# EAGLE board 226_grideye_l (EAGLE 9.6.2)
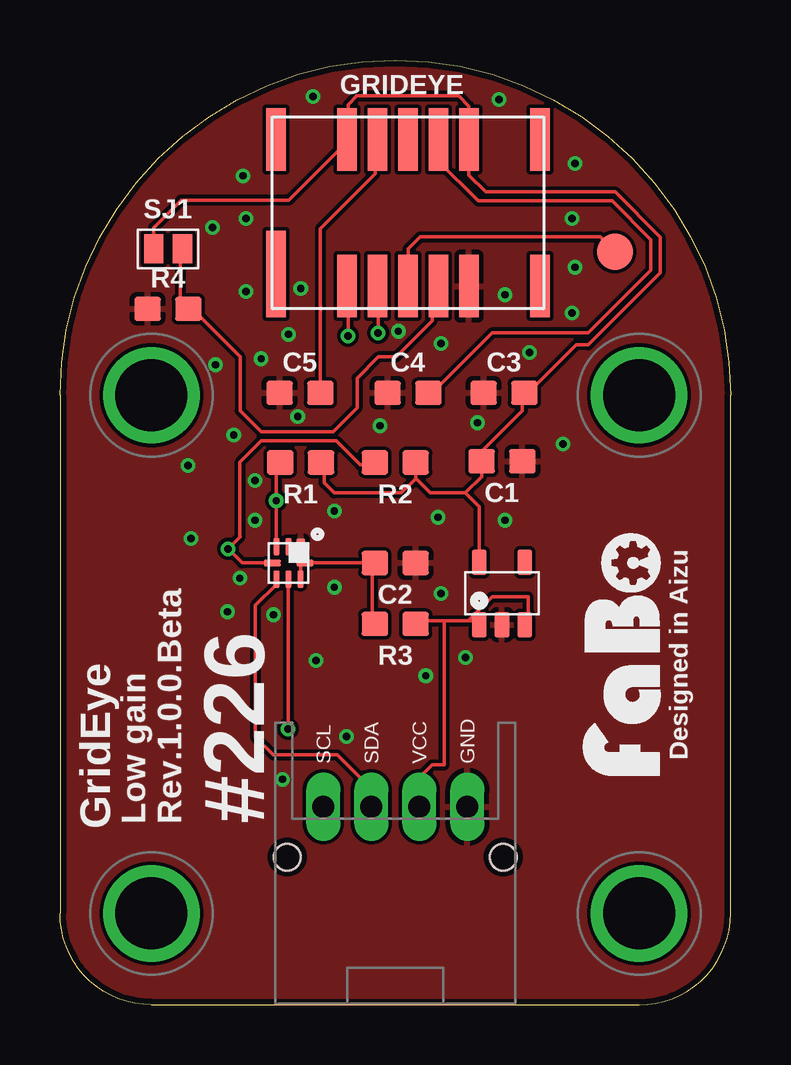
[diagram p0: board, top side]
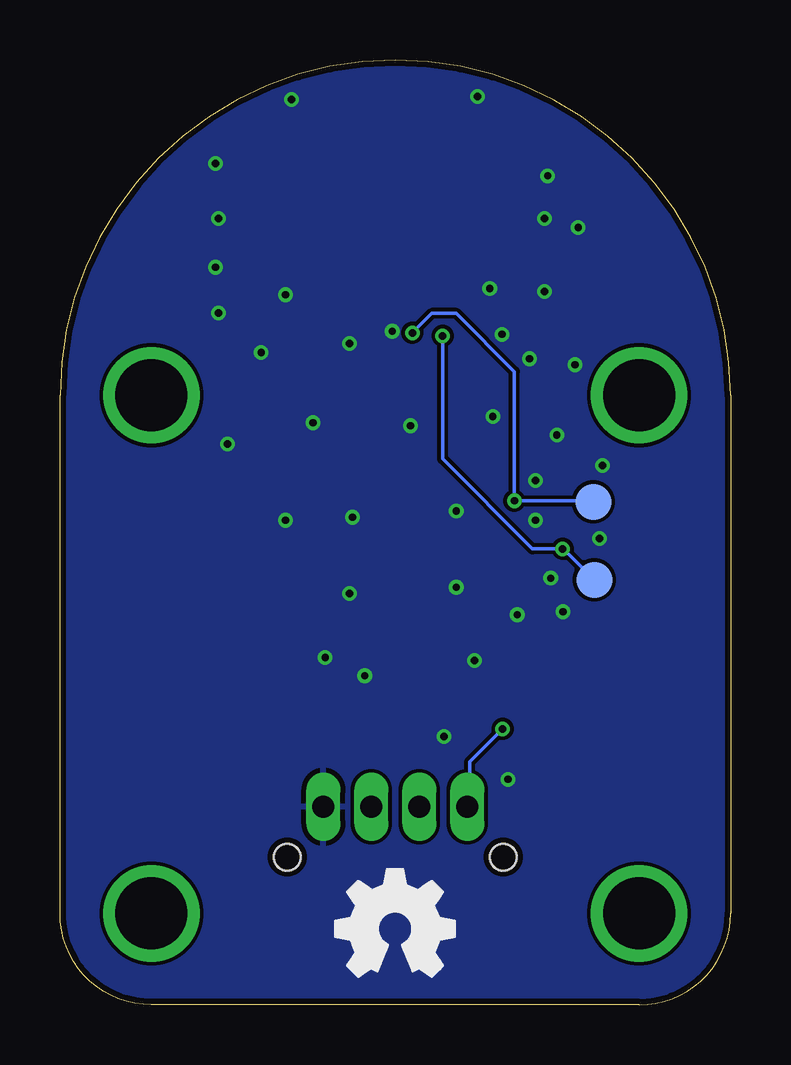
[diagram p1: board, bottom side, seen from below]

Size 27.94 x 39.37 mm. Coordinates in mm from the lower left corner, seen from the top.
Copper layers (1*16): Top 0.035mm / dielectric 1.6mm / Bottom 0.035mm
Design rules "PCBway": minimum track width 6mil, minimum drill 12mil, track to track 6mil, track to pad 6mil, pad to pad 6mil, via to via 6mil, smd to smd 6mil, copper to edge 10mil, drill to drill 10mil, minimum pad ring 10mil, minimum via ring 6mil, stop-mask expansion 2mil, vias tented up to drill 100mil, thermal gap 8mil

## Footprints (pad centres in the part's own frame; a part is rotated, then mirrored left to right if it is on the bottom)
0603 = smd 1.1 x 1: 1 -0.85,0; 2 0.85,0
PANASONIC-AMG8831 = smd 0.8 x 3.6: 1 -5.5,-2.55 | smd 0.8 x 2.6: 2 -2.54,-3.05; 3 -1.27,-3.05; 4 0,-3.05; 5 1.27,-3.05; 6 2.54,-3.05; 7 5.5,-3.05; 8 5.5,3.05; 9 2.54,3.05; 10 1.27,3.05; 11 0,3.05; 12 -1.27,3.05; 13 -2.54,3.05; 14 -5.5,3.05
SOT-23-5 = smd 0.6 x 1.05: 1 -0.95,-1.3; 2 0,-1.3; 3 0.95,-1.3; 4 0.95,1.3; 5 -0.95,1.3
XQFN8 = smd 0.7 x 0.35: 1 -0.675,0.5 | smd 0.7 x 0.25: 2 -0.675,0; 3 -0.675,-0.5; 5 0.675,-0.5; 6 0.675,0; 7 0.675,0.5 | smd 0.25 x 0.7: 4 0,-0.675; 8 0,0.675
TP-15 = smd 1.5 x 1.5: 1 0,0
FABO_BRICK_I2C = drill 0.9 pad 1.422 long: GND 3,-10.795; SCL -3,-10.795; SDA -1,-10.795; VCC 1,-10.795 | drill 3 pad 3.81: P$1 -10.16,6.35; P$2 10.16,6.35; P$3 -10.16,-15.24; P$4 10.16,-15.24 | hole 1.1: -4.5,-12.895; 4.5,-12.895
SMD-JUMPER-2-OPEN = smd 0.8 x 1.2: 1 -0.6,0; 2 0.6,0

## Placement (x,y rotation side)
C1  1uF  [0603]  18.41,22.66 180 top
C2  0.1uF  [0603]  13.97,18.41 180 top
C3  10uF  [0603]  18.5,25.5 0 top
C4  1uF  [0603]  14.5,25.5 0 top
C5  1.5uF  [0603]  10,25.5 0 top
GRIDEYE  PN-AMG8331  [PANASONIC-AMG8831]  14.5,33 0 top
IC2  [SOT-23-5]  18.41,17.14 0 top
IC3  [XQFN8]  9.53,18.41 270 top
INT  INT  [TP-15]  23.12,31.38 0 top
J1  [FABO_BRICK_I2C]  13.97,19.05 0 top
LOGO1  [LOGO_FABO_M]  25.4,14.61 90 top
R1  4.7k  [0603]  10.03,22.59 0 top
R2  4.7k  [0603]  13.97,22.59 0 top
R3  200k  [0603]  13.97,15.88 0 top
R4  10k  [0603]  4.5,29 0 top
SJ1  OPEN  [SMD-JUMPER-2-OPEN]  4.5,31.5 0 top
TP1  [TP-15]  5.67,17.7 0 bottom
TP2  [TP-15]  5.71,20.95 0 bottom
U$2  [LOGO_OSHW_M_BOTTOM]  13.97,3.17 0 top

## Library data of the parts
C1-C5 = FaBo-Capacitor
GRIDEYE = FaBo-Mems
IC2 INT SJ1 TP1 TP2 = FaBo-Supply
IC3 = FaBo-LevelTranslator
J1 = FaBo-Template
LOGO1 = component
R1-R4 = FaBo-Resistors
U$2 = FaBo-etc

## Nets
5V: IC2.1 IC2.3 J1.VCC R3.2
+3V3: C1.2 C3.2 GRIDEYE.9 GRIDEYE.13 IC2.5 R1.2 R2.2 SJ1.1
AD_SEL: GRIDEYE.5 R4.2 SJ1.2
GND: C1.1 C2.1 C3.1 C4.1 C5.1 GRIDEYE.6 IC2.2 IC3.1 J1.GND R4.1
N$1: C2.2 IC3.7 IC3.8 R3.1
N$2: GRIDEYE.4 INT.1
N$3: IC3.2
N$5: C5.2 GRIDEYE.12
N$6: C4.2 GRIDEYE.10
SCL: GRIDEYE.3 IC3.3 R1.1 TP2.1
SCL_HV: IC3.6 J1.SCL
SDA: GRIDEYE.2 IC3.4 R2.1 TP1.1
SDA_HV: IC3.5 J1.SDA

## Tracks (layer width: path | path; a pad name or v marks a point on that pad's centre or on a via)
5V
  Top 0.152: 16,16 17,16 | 17,16 17.5,16 17.46,15.96 IC2.1 | 17,16 18,17 19.5,17 19.5,16 19.36,15.87 IC2.3 | 16,16 16,10 15.5,10 15,9.5 15,8.29 J1.VCC | R3.2 14.95,16 16,16
+3V3
  Top 0.152: SJ1.1 3.9,32.39 5.04,33.53 9.53,33.53 11.96,35.96 GRIDEYE.13 | GRIDEYE.13 | GRIDEYE.13 12,36.09 12,37.5 12.37,37.87 16.61,37.87 17.04,37.45 GRIDEYE.9 17.04,34.56 17.73,33.87 23.13,33.87 25.01,31.99 25.01,30.51 22,27.5 21.5,27.5 19.5,25.5 C3.2 19.26,25.5 19.26,24.76 17.51,23.01 17.51,22.71 C1.2 17.57,22.01 16.89,21.34 | R1.2 11,22.47 11,21.75 11.42,21.34 14.22,21.34 14.82,21.93 R2.2 14.82,21.93 15.42,21.34 16.89,21.34 | IC2.5 17.46,20.76 16.89,21.34
AD_SEL
  Top 0.152: SJ1.2 5,31.5 5,29 R4.2 5.5,29 7.5,27 7.5,24.76 8.38,23.87 11.38,23.87 12.38,24.87 12.38,26.11 13.27,27 14,27 15.5,28.5 15.5,29.68 GRIDEYE.5
GND  (via drill 0.3)
  other vias: 17.4,24.26 13.34,24.13 9.91,24.51 8.13,21.84 8.13,20.19 11.43,20.57 15.75,20.32 7.24,23.75 5.46,19.43 7.49,17.78 11.43,17.4 15.88,17.14 18.54,20.19 19.56,27.18 15.88,27.56 14.1,28.07 9.53,27.94 6.48,26.67 8.38,26.92 20.95,23.37 16.89,14.48 15.24,13.72 10.67,14.35 6.99,16.38 8.89,16.26 9.27,9.4 11.94,11.18 21.34,28.83 21.46,30.73 21.34,32.77 18.54,29.59 10.03,29.84 7.75,29.72 6.35,32.38 7.75,32.77 7.62,34.54 21.46,35.05 18.29,37.72 10.54,37.85 5.33,22.48
  pour Bottom: 0,0 28,0 28,39.37 0,39.37
  pour Top: 0,0 28,0 28,39.37 0,39.37
N$1
  Top 0.152: R3.1 13,15.99 13,18.3 C2.2 IC3.8 10.03,18.41 IC3.7
N$2
  Top 0.152: INT.1 22.5,32 15,32 14.5,31.5 GRIDEYE.4
N$5
  Top 0.152: C5.2 10.85,32.35 13.13,34.63 13.13,35.44 13.23,35.54 GRIDEYE.12
N$6
  Top 0.152: C4.2 15.5,25.5 18,28 22,28 24.62,30.62 24.62,31.88 23,33.5 17.43,33.5 15.77,35.16 GRIDEYE.10
SCL  (via drill 0.3)
  Top 0.152: v9,21.01 9,22.42 R1.1 | v9,21.01 9,19 9.03,19.02 IC3.3 | v9,21.01 v9.01,21.01 | GRIDEYE.3 13.25,29.93 v13.25,28
  Bottom 0.152: TP2.1 5.77,21.01 v9.01,21.01 9.01,26.39 11.43,28.81 12.44,28.81 v13.25,28
SCL_HV  (via drill 0.3)
  Top 0.152: v9.5,11.5 9.5,17.5 9.53,17.52 IC3.6
  Bottom 0.152: v9.5,11.5 10.87,10.13 10.87,8.61 10.97,8.51 J1.SCL
SDA  (via drill 0.3)
  Top 0.152: v12,27.87 12,29.91 GRIDEYE.2 | R2.1 13.03,22.5 12.5,22.5 11.5,23.5 8.39,23.5 7.49,22.61 7.49,19.51 7.5,19.5 v7,19 7.58,18.41 IC3.4
  Bottom 0.152: v12,27.87 12,22.75 8.25,19 v7,19 6.97,19 TP1.1
SDA_HV
  Top 0.152: IC3.5 9.03,17.52 8.14,16.64 8.14,11.16 8.89,10.41 11.56,10.41 12.97,9 J1.SDA

## Text on the board
tPlace: Designed in Aizu | #226 | Low gain | Rev.1.0.0.Beta | GridEye